# EAGLE board Chameleon-Mini-RevE (EAGLE 6.6.0)
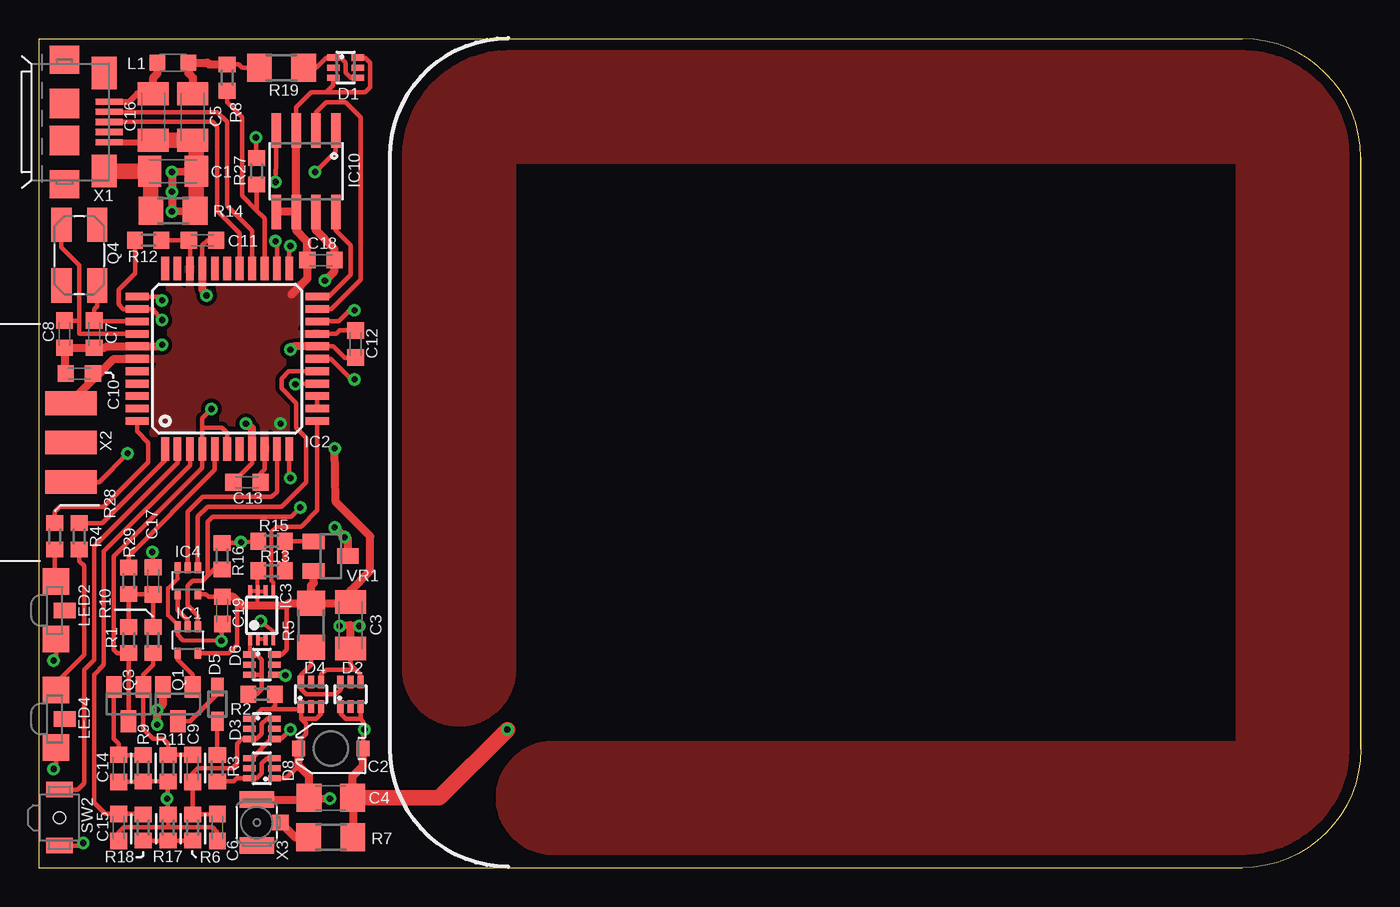
[diagram p0: board, top side]
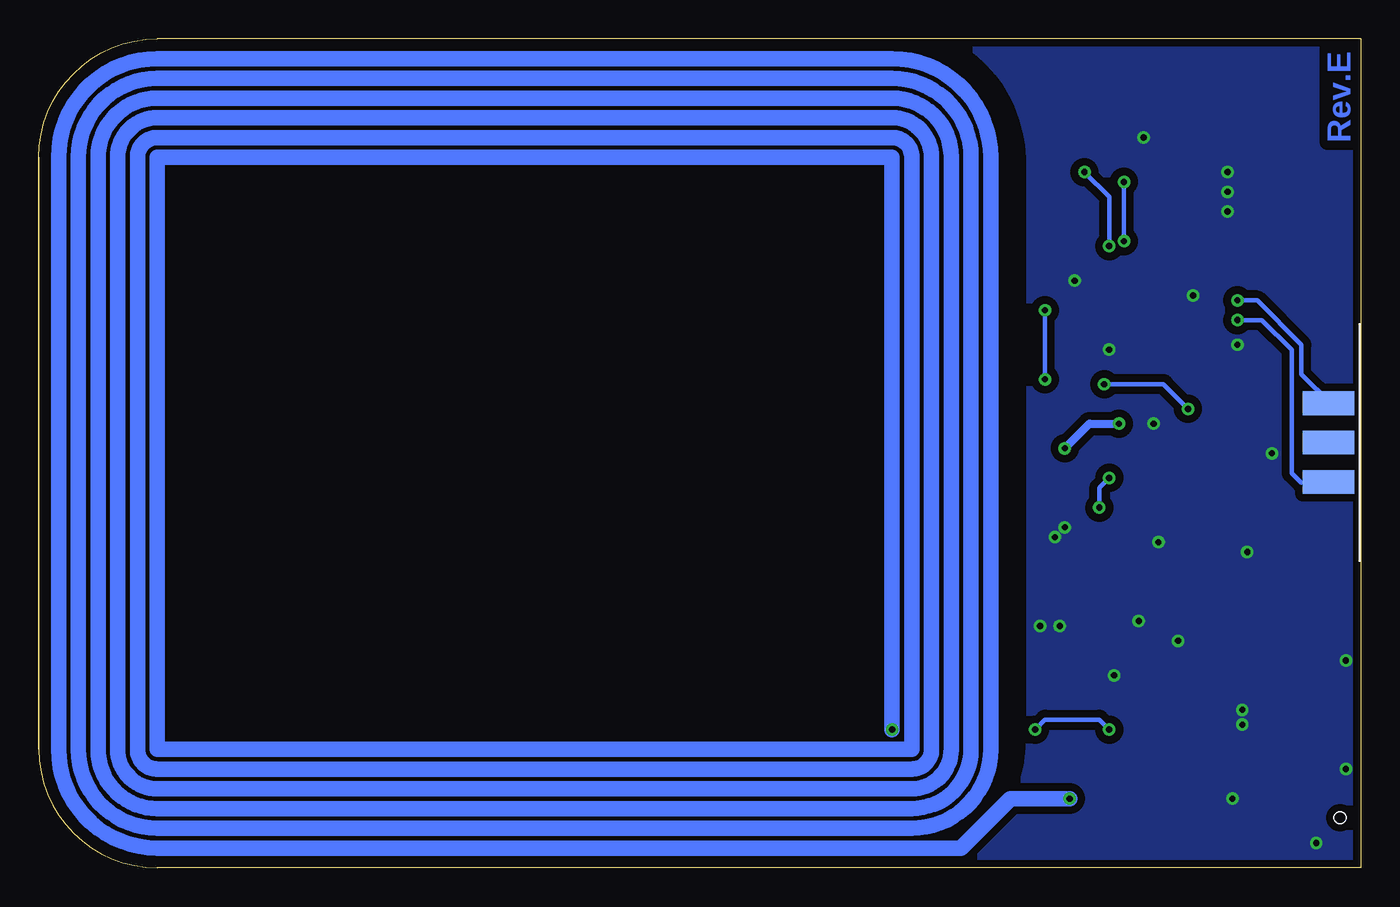
[diagram p1: board, bottom side, seen from below]

Size 85.09 x 53.34 mm. Coordinates in mm from the lower left corner, seen from the top.
Outline: 0,0 77.47,0 arc90 85.09,7.62 85.09,45.72 arc90 77.47,53.34 0,53.34 0,0
Copper layers (1*16): Top 0.035mm / dielectric 1.5mm / Bottom 0.035mm
Design rules "mein *": minimum track width 0.2mm, minimum drill 0.4mm, track to track 0.18mm, track to pad 0.18mm, pad to pad 0.18mm, via to via 0.18mm, smd to smd 0mil, copper to edge 0.2mm, drill to drill 0.2mm, minimum pad ring 0.25mm, minimum via ring 0.2mm, stop-mask expansion 4mil, vias tented up to drill 0mil, thermal gap 0.5mm
Milling: 6 lines

## Footprints (pad centres in the part's own frame; a part is rotated, then mirrored left to right if it is on the bottom)
C1206K = smd 1.5 x 2: 1 -1.5,0; 2 1.5,0
TZC3P = smd 1 x 0.85: 1 0,2.075; 2 0,-2.075
C1206 = smd 1.6 x 1.8: 1 -1.4,0; 2 1.4,0
C0603K = smd 1.05 x 1.08: 1 -0.875,0; 2 0.875,0
SOT363_PHILIPS = smd 0.4 x 0.8: 1 -0.65,-0.8; 2 0,-0.8; 3 0.65,-0.8; 4 0.65,0.8; 5 0,0.8; 6 -0.65,0.8
SOD323 = smd 1.2 x 0.8: 1 -1.1,0; 2 1.1,0
SC70-5 = smd 0.4 x 0.7: 1 -0.65,-0.85; 2 0,-0.85; 3 0.65,-0.85; 4 0.65,0.85; 5 -0.65,0.85
TQFP44 = smd 1.5 x 0.5: 1 -5.8,4; 2 -5.8,3.2; 3 -5.8,2.4; 4 -5.8,1.6; 5 -5.8,0.8; 6 -5.8,0; 7 -5.8,-0.8; 8 -5.8,-1.6; 9 -5.8,-2.4; 10 -5.8,-3.2; 11 -5.8,-4; 23 5.8,-4; 24 5.8,-3.2; 25 5.8,-2.4; 26 5.8,-1.6; 27 5.8,-0.8; 28 5.8,0; 29 5.8,0.8; 30 5.8,1.6; 31 5.8,2.4; 32 5.8,3.2; 33 5.8,4 | smd 0.5 x 1.5: 12 -4,-5.8; 13 -3.2,-5.8; 14 -2.4,-5.8; 15 -1.6,-5.8; 16 -0.8,-5.8; 17 0,-5.8; 18 0.8,-5.8; 19 1.6,-5.8; 20 2.4,-5.8; 21 3.2,-5.8; 22 4,-5.8; 34 4,5.8; 35 3.2,5.8; 36 2.4,5.8; 37 1.6,5.8; 38 0.8,5.8; 39 0,5.8; 40 -0.8,5.8; 41 -1.6,5.8; 42 -2.4,5.8; 43 -3.2,5.8; 44 -4,5.8
VSSOP8 = smd 0.75 x 0.25: 1 -1.55,0.75; 2 -1.55,0.25; 3 -1.55,-0.25; 4 -1.55,-0.75; 5 1.55,-0.75; 6 1.55,-0.25; 7 1.55,0.25; 8 1.55,0.75
SO08 = smd 0.61 x 2.21: 1 -1.905,-2.616; 2 -0.635,-2.616; 3 0.635,-2.616; 4 1.905,-2.616; 5 1.905,2.616; 6 0.635,2.616; 7 -0.635,2.616; 8 -1.905,2.616
L2012C = smd 1 x 1: 1 -1,0; 2 1,0
HSMX-C110 = smd 1.7 x 1.7: A -1.85,0.1; C 1.85,0.1 | smd 1 x 1.4: P$3 0,0.65
SOT23 = smd 1 x 1.4: 1 -0.95,-1.1; 2 0.95,-1.1; 3 0,1.1
5MMX3.2MM = smd 2.2 x 1.3: 1 -1.95,-1.15; 2 1.95,-1.15; 3 1.95,1.15; 4 -1.95,1.15
R0603 = smd 1 x 1.1: 1 -0.85,0; 2 0.85,0
R1206 = smd 1.6 x 1.803: 1 -1.422,0; 2 1.422,0
B3U-3000P-B = smd 1 x 1.7: 1 -1.8,0; 2 1.8,0 | hole 0.75: 0,0
ZX62-B-5PA-LONG = smd 0.4 x 1.75: 1 -1.3,2.875; 2 -0.65,2.875; 3 0,2.875; 4 0.65,2.875; 5 1.3,2.875 | smd 2.1 x 1.6: P$1 -3.15,2.55; P$2 3.15,2.55 | smd 1.8 x 1.9: P$3 -4,0; P$4 4,0 | smd 1.9 x 1.9: P$5 -1.2,0; P$6 1.2,0
PINHD-2X3-2.54-EDGE = smd 3.302 x 1.524 bottom: 1 2,2.54; 3 2,0; 5 2,-2.54 | smd 3.302 x 1.524: 2 2,2.54; 4 2,0; 6 2,-2.54
U.FL-R-SMT = smd 1.05 x 2.2: GND1 -1.475,0; GND2 1.475,0 | smd 1 x 1.05: SIG 0,-1.525

## Placement (x,y rotation side)
C1  10n  [C1206K]  8.64,44.82 0 top
C2  TZC3P200A110  [TZC3P]  18.8,7.67 90 top
C3  10u/6.3V/X5R  [C1206K]  20.07,15.61 90 top
C4  N.M.  [C1206]  18.8,4.5 180 top
C5  100n  [C1206K]  9.91,48.31 270 top
C6  22p/NP0  [C0603K]  11.49,2.59 270 top
C7  22p  [C0603K]  3.56,34.34 270 top
C8  22p  [C0603K]  1.65,34.34 270 top
C9  220p  [C0603K]  9.91,6.4 90 top
C10  100n  [C0603K]  2.6,31.8 180 top
C11  100n  [C0603K]  10.54,40.37 0 top
C12  100n  [C0603K]  20.38,33.71 270 top
C13  100n  [C0603K]  13.4,24.82 180 top
C14  100n  [C0603K]  5.14,6.4 270 top
C15  100n  [C0603K]  5.14,2.59 270 top
C16  10n  [C1206K]  7.37,48.31 270 top
C17  100n  [C0603K]  7.37,18.47 90 top
C18  100n  [C0603K]  18.16,39.1 0 top
C19  100n  [C0603K]  11.81,16.56 270 top
D1  BAS70-07S  [SOT363_PHILIPS]  19.75,51.49 270 top
D2  BAS70-07S  [SOT363_PHILIPS]  20.07,11.16 0 top
D3  BAS70-07S  [SOT363_PHILIPS]  14.35,8.94 270 top
D4  BAS70-07S  [SOT363_PHILIPS]  17.53,11.16 0 top
D5  BZX384-C2V7  [SOD323]  11.49,10.53 90 top
D6  BAS70-07S  [SOT363_PHILIPS]  14.35,13.07 270 top
D8  BAS70-07S  [SOT363_PHILIPS]  14.35,6.4 90 top
IC1  SN74LVC1G08DCK  [SC70-5]  9.59,14.66 180 top
IC2  ATxmega32A4U-AU  [TQFP44]  12.13,32.75 90 top
IC3  SN74LVC1G74DCU  [VSSOP8]  14.35,16.24 90 top
IC4  SN74LVC1G86DCK  [SC70-5]  9.59,18.47 180 top
IC10  AT45DB081D-SSU  [SO08]  17.21,44.82 180 top
L1  33R@100MHz  [L2012C]  8.64,51.8 0 top
LED2  HSMS-C110  [HSMX-C110]  1.02,16.56 270 top
LED4  HSMG-C110  [HSMX-C110]  1.02,9.58 270 top
Q1  BSS138BK  [SOT23]  8.95,10.53 180 top
Q3  BC846B  [SOT23]  5.78,10.53 180 top
Q4  12MHz  [5MMX3.2MM]  2.6,39.42 270 top
R1  10k  [R0603]  5.78,14.66 90 top
R2  1k  [R0603]  14.35,11.16 180 top
R3  10R  [R0603]  11.49,6.4 270 top
R4  220R  [R0603]  2.6,21.32 270 top
R5  470R  [R1206]  17.53,15.61 90 top
R6  10k  [R0603]  9.91,2.59 90 top
R7  1k  [R1206]  18.8,1.96 180 top
R8  4k7  [R0603]  12.13,50.85 90 top
R9  1k  [R0603]  6.73,6.4 90 top
R10  100k  [R0603]  7.37,14.66 90 top
R11  47k  [R0603]  8.32,6.4 90 top
R12  10k  [R0603]  7.05,40.37 0 top
R13  200k  [R0603]  14.99,19.1 180 top
R14  1Meg  [R1206]  8.64,42.28 180 top
R15  120k  [R0603]  14.99,21.01 0 top
R16  100k  [R0603]  11.81,20.05 270 top
R17  220R  [R0603]  8.32,2.59 270 top
R18  220R  [R0603]  6.73,2.59 90 top
R19  22R  [R1206]  15.62,51.49 0 top
R27  10k  [R0603]  14.03,44.82 270 top
R28  220R  [R0603]  1.02,21.32 270 top
R29  220R  [R0603]  5.78,18.47 90 top
SW2  B3U-3000P-B  [B3U-3000P-B]  1.33,3.23 90 top
VR1  TLVH431(A)IDBZR  [SOT23]  18.8,20.05 270 top
X1  ZX62-B-5PA  [ZX62-B-5PA-LONG]  1.65,47.99 270 top
X2  [PINHD-2X3-2.54-EDGE]  0.06,27.36 0 top
X3  U.FL-R-SMT  [U.FL-R-SMT]  14.03,2.91 90 top

## Library data of the parts
C1 C3-C19 L1 R1-R19 R27-R29 = rcl
C2 = Murata-TZC3P
D1-D4 D6 D8 = diode
D5 = NXP-BZX384
IC1 IC4 = 74xx-little-de
IC2 = _ATxmega
IC3 = 74LVC1G74
IC10 = SparkFun
LED2 LED4 = Avago-HSM
Q1 = transistor-small-signal
Q3 = transistor-npn
Q4 = TXC-Crystal
SW2 = Omron-B3U
VR1 = TLVH431
X1 = Hirose-USB
X2 = PINHD
X3 = Hirose-UFL

## Nets
ANTENNA-A: C2.1 C2.2 C4.1 C4.2 D2.1 D2.3 D3.1 D3.4 D4.1 D4.3 D8.1 D8.4 R2.1 R7.1 X3.GND2
BITRATE/SCK: IC2.17 IC2.20
BUTTON: IC2.2 SW2.2
DEMOD-PWR: IC2.5 R29.2
DEMOD/MOSI/ASYNC: IC2.4 IC2.6 IC2.15 Q3.3 R1.1
FLASH-CS: IC2.24 IC10.4
FLASH-MISO: IC2.22 IC10.8
FLASH-MOSI: IC2.23 IC10.1
FLASH-SCK: IC2.21 IC10.2
GND: C1.2 C3.1 C5.2 C6.2 C7.2 C8.2 C10.2 C11.2 C12.2 C13.2 C14.2 C15.2 C16.2 C17.2 C18.2 C19.2 D2.4 D4.4 D6.4 IC1.3 IC2.8 IC2.18 IC2.30 IC2.38 IC3.4 IC4.3 IC10.7 LED2.C LED4.C Q1.2 R9.1 R11.1 R14.1 R15.1 R16.1 R17.1 R27.1 SW2.1 VR1.3 X1.5 X2.6
HALFCARRIER: IC2.12 IC3.5
LED-GREEN: IC2.1 R4.1
LED-RED: IC2.44 R28.1
LOADMOD/MISO: IC2.16 IC4.1
MOD-DEMOD: D8.3 D8.6 R3.2
MOD-DEMOD1: C6.1 C9.1 D3.3 D3.6 R6.2
MODSTART/SS: IC2.13 IC2.14
N$1: C14.1 Q3.2 R9.2
N$2: C5.1 L1.2 R8.2 R19.1
N$3: D5.2 Q1.3
N$4: IC3.2 IC3.3
N$5: C7.1 IC2.36 Q4.3
N$6: R6.1 R17.2 R18.1
N$7: C16.1 L1.1 X1.1
N$8: C8.1 IC2.37 Q4.1
N$9: LED2.A R28.2
N$10: D2.6 D4.6 R5.1
N$11: IC1.2 IC4.4
N$12: D5.1 R3.1
N$13: LED4.A R4.2
N$14: IC1.4 Q1.1
N$15: R7.2 X3.SIG
N$56: C9.2 Q3.1 R10.1 R11.2
N$59: C1.1 R14.2 X1.P$2
N$62: R13.1 R15.2 VR1.1
N$66: D1.1 D1.4 R19.2
N$1234: D6.1 D6.3 IC3.1 R2.2
N$12345: C17.1 R1.2 R10.2 R29.1
PDI-CLK: IC2.35 R12.1 X2.5
PDI-DATA: IC2.34 X2.1
RSSI: C15.1 IC2.3 R18.2
SUBCARRIER-OOK: IC1.1 IC2.11 R16.2
SUBCARRIER-PSK: IC2.10 IC4.2
USB-DM: IC2.26 X1.2
USB-DP: IC2.27 X1.3
USB-SENSE: IC2.25 R8.1 R27.2
VCC: C3.2 C10.1 C11.1 C12.1 C13.1 C18.1 C19.1 D1.3 D1.6 D6.6 IC1.5 IC2.9 IC2.19 IC2.31 IC2.39 IC3.6 IC3.7 IC3.8 IC4.5 IC10.3 IC10.5 IC10.6 R5.2 R12.2 R13.2 VR1.2 X2.2

## Tracks (layer width: path | path; a pad name or v marks a point on that pad's centre or on a via)
ANTENNA-A  (via drill 0.4)
  Top 0.3: D2.1 19.42,9.91 19.75,9.58 20.7,9.58 | D2.3 20.72,9.59 20.7,9.58 | D4.3 18.18,9.91 17.84,9.58 16.89,9.58 | 16.89,9.58 16.88,9.59 D4.1 16.72,10.21 14.99,10.21 | D3.1 13.73,9.59 14.35,10.21 14.99,10.21 | R2.1 15.2,10.43 14.99,10.21 | D8.4 13.73,7.05 14.97,8.29 D3.4 15.61,8.29 v16.19,8.89 | D8.1 15.9,5.75 16.72,6.57 | C2.1 16.72,8.14 17.21,8.62 17.21,9.26 16.89,9.58 | C2.2 20.87,8.94 | 20.87,8.94 20.87,9.41 20.7,9.58 | 20.87,8.94 v20.95,8.89
  Top 0.5: R7.1 20.22,4.47 C4.1 20.2,5.9 20.87,6.57 C2.2 | C4.2 17.4,5.9 16.72,6.57 C2.1 | C4.2 v18.73,4.45 | X3.GND2 17.28,4.38 C4.2
  Top 1: C4.1 25.78,4.5 v30.16,8.89
  Bottom 0.3: v20.95,8.89 20.32,9.53 16.83,9.53 v16.19,8.89
  Bottom 1: v30.16,8.89 30.16,45.72 77.47,45.72 77.47,7.62 28.89,7.62 28.89,45.72 arc-90 30.16,46.99 77.47,46.99 arc-90 78.74,45.72 78.74,7.62 arc-90 77.47,6.35 28.89,6.35 arc-90 27.62,7.62 27.62,45.72 arc-90 30.16,48.26 77.47,48.26 arc-90 80.01,45.72 80.01,7.62 arc-90 77.47,5.08 28.89,5.08 arc-90 26.35,7.62 26.35,45.72 arc-90 30.16,49.53 77.47,49.53 arc-90 81.28,45.72 81.28,7.62 arc-90 77.47,3.81 28.89,3.81 arc-90 25.08,7.62 25.08,45.72 arc-90 30.16,50.8 77.47,50.8 arc-90 82.55,45.72 82.55,7.62 arc-90 77.47,2.54 28.89,2.54 arc-90 23.81,7.62 23.81,45.72 arc-90 30.16,52.07 77.47,52.07 arc-90 83.82,45.72 83.82,7.62 arc-90 77.47,1.27 25.72,1.27 22.54,4.45 v18.73,4.45
BITRATE/SCK  (via drill 0.4)
  Top 0.3: IC2.17 18.8,32.75 20.07,31.48 v20.32,31.43 | v20.32,35.88 20.07,35.93 19.29,35.15 IC2.20
  Bottom 0.3: v20.32,31.43 v20.32,35.88
BUTTON
  Top 0.3: IC2.2 8.93,26.06 3.56,20.69 3.56,13.39 2.92,12.75 2.92,5.45 2.5,5.03 SW2.2
DEMOD-PWR
  Top 0.3: R29.2 5.78,20.05 11.33,25.6 IC2.5
DEMOD/MOSI/ASYNC  (via drill 0.4)
  Top 0.3: Q3.3 R1.1 5.04,13.81 4.83,14.02 4.83,20.05 10.53,25.76 IC2.4 10.53,28.31 | IC2.15 16.59,31.15 v16.51,31.11 | 10.53,28.31 10.53,28.93 v11.11,29.53 | IC2.6 12.13,27.99 11.81,28.31 10.53,28.31
  Bottom 0.3: v16.51,31.11 12.7,31.11 v11.11,29.53
FLASH-CS  (via drill 0.4)
  Top 0.3: IC2.24 15.33,40.35 v15.24,40.32 | v15.24,44.13 IC10.4
  Bottom 0.3: v15.24,40.32 v15.24,44.13
FLASH-MISO
  Top 0.3: IC2.22 18.67,36.75 20.07,38.15 20.07,40.06 19.11,41.01 IC10.8
FLASH-MOSI  (via drill 0.4)
  Top 0.3: IC2.23 16.13,39.93 v16.19,40.01 | v17.78,44.77 19.11,46.09 IC10.1
  Bottom 0.3: v16.19,40.01 16.19,43.18 v17.78,44.77
FLASH-SCK
  Top 0.3: IC2.21 18.82,35.95 20.7,37.83 20.7,48.31 19.75,49.26 18.48,49.26 17.84,48.63 IC10.2
GND  (via drill 0.4)
  Top 0.25: D6.4 15.95,12.42 v15.88,12.38 | 8.94,15.62 8.32,16.24 8.32,17.99 8.94,18.61 IC4.3 | IC3.4 15.1,15.18 v14.29,15.88
  Top 0.3: X2.6 3.87,24.82 v5.71,26.67 | D2.4 20.72,12.42 20.38,12.75 | D4.4 18.18,12.45 18.48,12.75 20.38,12.75 | C3.1 20.07,13.07 20.38,12.75 | C15.2 5.14,2.27 5.46,2.59 8.32,2.59 | C6.2 11.49,2.27 11.18,2.59 8.32,2.59 | 8.32,2.59 R17.1 v8.26,4.45 R11.1 R9.1 6.71,5.53 C14.2 | IC2.18 18.95,33.55 19.67,32.83 C12.2 | C17.2 v7.3,20.32 | IC2.30 10.53,40.04 10.86,40.37 C11.2 | 8.94,15.62 IC1.3 8.94,14.99 9.27,14.66 v11.75,14.61 C19.2 | SW2.1 2.71,1.43 v2.86,1.59 | IC2.8 13.73,26.02 C13.2 | R16.1 12.98,20.9 v13.02,20.95 R15.1 | R27.1 v13.97,46.99 | LED4.C 1.12,6.5 v0.95,6.35 | LED2.C 1.12,13.49 v0.95,13.34
  Top 0.4: X1.5 7.25,46.69 C16.2
  Top 0.5: 10.14,42.36 R14.1 v8.57,42.23 v8.57,43.5 v8.57,44.77 C1.2 | C5.2 10.14,46.58 | v7.94,33.66 7.85,33.55 IC2.38 4.36,33.55 4.27,33.47 C7.2 C8.2 1.65,31.88 C10.2 | IC2.8 13.73,28.3 v13.34,28.57 | IC2.18 16.42,33.55 v16.19,33.34 | IC2.30 10.53,37.21 v10.79,36.83 | C3.1 20.07,15.61 | 20.07,15.61 v19.37,15.56 | 20.07,15.61 v20.64,15.56 | Q1.2 8,10.53 v7.62,10.16 v7.62,9.21 | VR1.3 19.9,21.18 v19.68,21.27 v19.05,21.91 | IC10.7 17.84,41.01 19.04,39.82 C18.2 19.04,38.39 v18.41,37.78
  Top 1: C16.2 C5.2 | 10.14,42.36 C1.2 10.14,46.58
  pour Bottom (isolate 0.5): 30.8,54.61 0,54.61 0,-1.27 30.8,-1.27 arc-90 21.27,8.26 21.27,45.72 arc-90
HALFCARRIER
  Top 0.25: IC3.5 15.1,18.35 14.99,18.47 14.99,21.64 15.3,21.96 15.94,21.96
  Top 0.3: IC2.12 17.93,23 16.89,21.96 15.94,21.96
LED-GREEN
  Top 0.3: IC2.1 8.13,26.21 4.09,22.17 R4.1
LED-RED
  Top 0.3: IC2.44 6.33,28.08 7.05,27.36 7.05,26.09 4.19,23.23 1.33,23.23 1.02,22.91 R28.1
LOADMOD/MISO
  Top 0.3: IC4.1 10.24,22.61 10.86,23.23 15.62,23.23 17.21,24.82 17.21,27.67 16.57,28.31 16.57,29.9 15.62,30.85 15.62,31.48 16.09,31.95 IC2.16
MOD-DEMOD
  Top 0.3: D8.3 14.68,7.05 14.35,6.72 14.35,6.08 14.02,5.75 D8.6 12.75,5.75 12.55,5.55 R3.2
MOD-DEMOD1
  Top 0.3: C6.1 11.47,3.44 R6.2 C9.1 9.91,6.08 10.22,6.4 12.45,6.4 12.76,6.72 12.76,7.99 13.07,8.29 D3.3 14.02,8.29 14.35,8.62 14.35,9.26 14.68,9.59 D3.6
MODSTART/SS
  Top 0.3: IC2.13 IC2.14
N$1
  Top 0.3: R9.2 5.17,7.25 C14.1 5.14,7.99 4.83,8.31 Q3.2
N$2
  Top 0.3: R19.1 13.08,51.49 12.87,51.7 R8.2
  Top 0.5: C5.1 9.91,50.85 9.64,51.12 L1.2 10.86,51.8 10.96,51.7 R8.2
N$3
  Top 0.3: D5.2 11.49,11.16 9.76,9.43 Q1.3
N$4
  Top 0.25: IC3.3 IC3.2
N$5
  Top 0.3: Q4.3 3.75,36.13 3.56,35.93 C7.1 3.62,35.15 IC2.36
N$6
  Top 0.3: R18.1 R17.2 R6.1
N$7
  Top 0.4: X1.1 5.81,49.29 6.33,49.81 C16.1
  Top 0.5: L1.1 7.64,51.12 7.37,50.85 C16.1
N$8
  Top 0.3: 2.6,35.29 2.6,38.79 1.45,39.94 Q4.1 | C8.1 2.53,35.22 2.6,35.29 | IC2.37 2.6,34.35 2.6,35.29
N$9
  Top 0.3: R28.2 1.02,18.51 LED2.A
N$10
  Top 0.3: R5.1 17.53,13.07 16.88,12.42 D4.6 16.88,11.5 17.21,11.16 19.11,11.16 19.42,11.47 D2.6
N$11
  Top 0.3: IC4.4 8.94,16.58 9.59,15.93 IC1.2
N$12
  Top 0.3: R3.1 D5.1
N$13
  Top 0.3: R4.2 2.6,19.74 2.92,19.42 2.92,13.7 1.12,11.9 LED4.A
N$14
  Top 0.3: IC1.4 8.94,13.4 9.9,12.44 Q1.1
N$15
  Top 0.5: R7.2 16.51,1.96 X3.SIG
N$17
  pour Top: 77.53,52.12 30.23,52.12 arc90 23.88,45.77 23.88,12.75 arc90 27.05,9.58 arc90 30.23,12.75 30.23,45.77 77.53,45.77 77.53,7.67 33.08,7.67 arc90 29.91,4.5 arc90 33.08,1.32 77.53,1.32 arc90 83.88,7.67 83.88,45.77 arc90
N$56
  Top 0.3: C9.2 8.34,7.28 R11.2 8.32,7.99 8,8.31 7.37,8.31 6.73,8.94 Q3.1 6.73,12.43 7.37,13.07 R10.1
N$59
  Top 0.5: 7.21,44.74 C1.1 | 4.23,44.82 X1.P$2
  Top 1: R14.2 7.21,44.74 | C1.1 4.23,44.82
N$62
  Top 0.3: R13.1 R15.2 16.57,21.01 16.58,21 VR1.1
N$66
  Top 0.3: R19.2 17.84,51.49 18.49,52.14 D1.1 19.42,52.14 19.75,51.8 19.75,51.17 20.08,50.84 D1.4
N$1234
  Top 0.25: IC3.1 13.6,13.77 D6.1
  Top 0.3: R2.2 14.03,11.16 14.35,11.48 14.35,12.43 | D6.3 14.34,12.42 14.35,12.43 | D6.1 14.02,13.72 14.35,13.39 14.35,12.43
N$12345
  Top 0.3: R10.2 C17.1 7.34,17.62 R29.1 R1.2
PDI-CLK  (via drill 0.4)
  Top 0.3: v7.94,35.24 7.34,35.95 IC2.35 5.44,35.95 5.14,36.25 5.14,37.2 6.2,38.25 R12.1
  Bottom 0.3: X2.5 3.81,24.77 4.45,25.4 4.45,33.34 6.35,35.24 v7.94,35.24
PDI-DATA  (via drill 0.4)
  Top 0.3: IC2.34 7.81,36.75 v7.94,36.51
  Bottom 0.3: X2.1 1.91,29.84 3.81,31.75 3.81,33.66 6.67,36.51 v7.94,36.51
RSSI
  Top 0.3: IC2.3 9.73,25.91 4.19,20.37 4.19,13.07 3.56,12.43 3.56,4.18 4.27,3.47 C15.1 6.71,3.47 R18.2
SUBCARRIER-OOK  (via drill 0.4)
  Top 0.3: IC1.1 10.24,16.23 9.59,16.88 9.59,18.15 9.91,18.47 10.54,18.47 10.86,18.78 | 10.86,18.78 10.86,22.28 11.18,22.59 16.26,22.59 v16.83,23.18 | IC2.11 16.13,25.26 v16.19,25.08 | R16.2 11.28,19.2 10.86,18.78
  Bottom 0.3: v16.83,23.18 16.83,24.45 v16.19,25.08
SUBCARRIER-PSK
  Top 0.3: IC2.10 15.33,24.21 14.99,23.86 10.54,23.86 9.59,22.91 IC4.2
USB-DM
  Top 0.3: IC2.26 13.73,41 12.13,42.6 12.13,47.99 11.49,48.63 4.54,48.63 X1.2
USB-DP
  Top 0.3: IC2.27 12.93,40.84 11.49,42.28 11.49,47.68 11.18,47.99 X1.3
USB-SENSE
  Top 0.3: IC2.25 14.53,41.78 14.03,42.28 | 14.03,42.28 13.08,43.23 13.08,48.31 12.13,49.26 R8.1 | 14.03,42.28 R27.2
VCC  (via drill 0.4)
  Top 0.25: IC3.7 IC3.6 | IC3.7 IC3.8 | IC3.7 14.1,16.95 14.03,16.88 | IC3.7 14.1,19.07 R13.2
  Top 0.3: R12.2 C11.1 9.73,40.31 IC2.31 | D1.6 21,52.14 21.34,51.8 21.34,50.22 21.02,49.9 18.48,49.9 | D1.3 18.95,50.37 18.48,49.9 | IC2.19 19.13,34.35 19.35,34.58 C12.1 | IC1.5 12.23,13.81 12.76,14.34 12.76,17.2 | IC4.5 10.76,17.62 10.94,17.44 C19.1 | D6.6 15.64,13.72 15.94,14.02 15.94,16.88 | IC2.9 14.53,25.63 14.27,25.37 C13.1 | IC10.3 16.57,48.95 17.53,49.9 18.48,49.9
  Top 0.5: IC2.39 4.83,32.75 3.87,31.8 C10.1 3.48,31.41 2.06,29.99 X2.2 | R5.2 19.99,17.03 C3.2 20.07,17.83 21.34,19.1 21.34,21.32 19.11,23.55 v19.05,26.99 | VR1.2 17.7,18.32 17.53,18.15 R5.2 | C19.1 12.52,17.44 12.76,17.2 13.08,16.88 14.03,16.88 15.94,16.88 16.09,17.03 R5.2 | 16.26,36.88 17.29,37.91 C18.1 17.29,40.3 16.57,41.01 IC10.6 | IC10.6 IC10.5 | IC10.6 IC10.3
  Bottom 0.5: v19.05,26.99 17.46,28.57 v15.56,28.57
  pour Top (isolate 0.25): 15.94,38.47 8.32,38.47 6.41,36.56 6.41,28.31 7.68,27.04 15.94,27.04 17.84,28.94 17.84,36.56

## Text on the board
Bottom: Rev.E